# Altium PCB TINY RTC I2C MODULE.pcbdoc
Units mil, origin at the board's own origin, x right, y up, seen from the top; angles counter-clockwise.
Board outline 2205 x 2070 mil, 2 copper layers (Top Layer, Bottom Layer); 1 components, 0 nets, 14 pads, 0 vias.
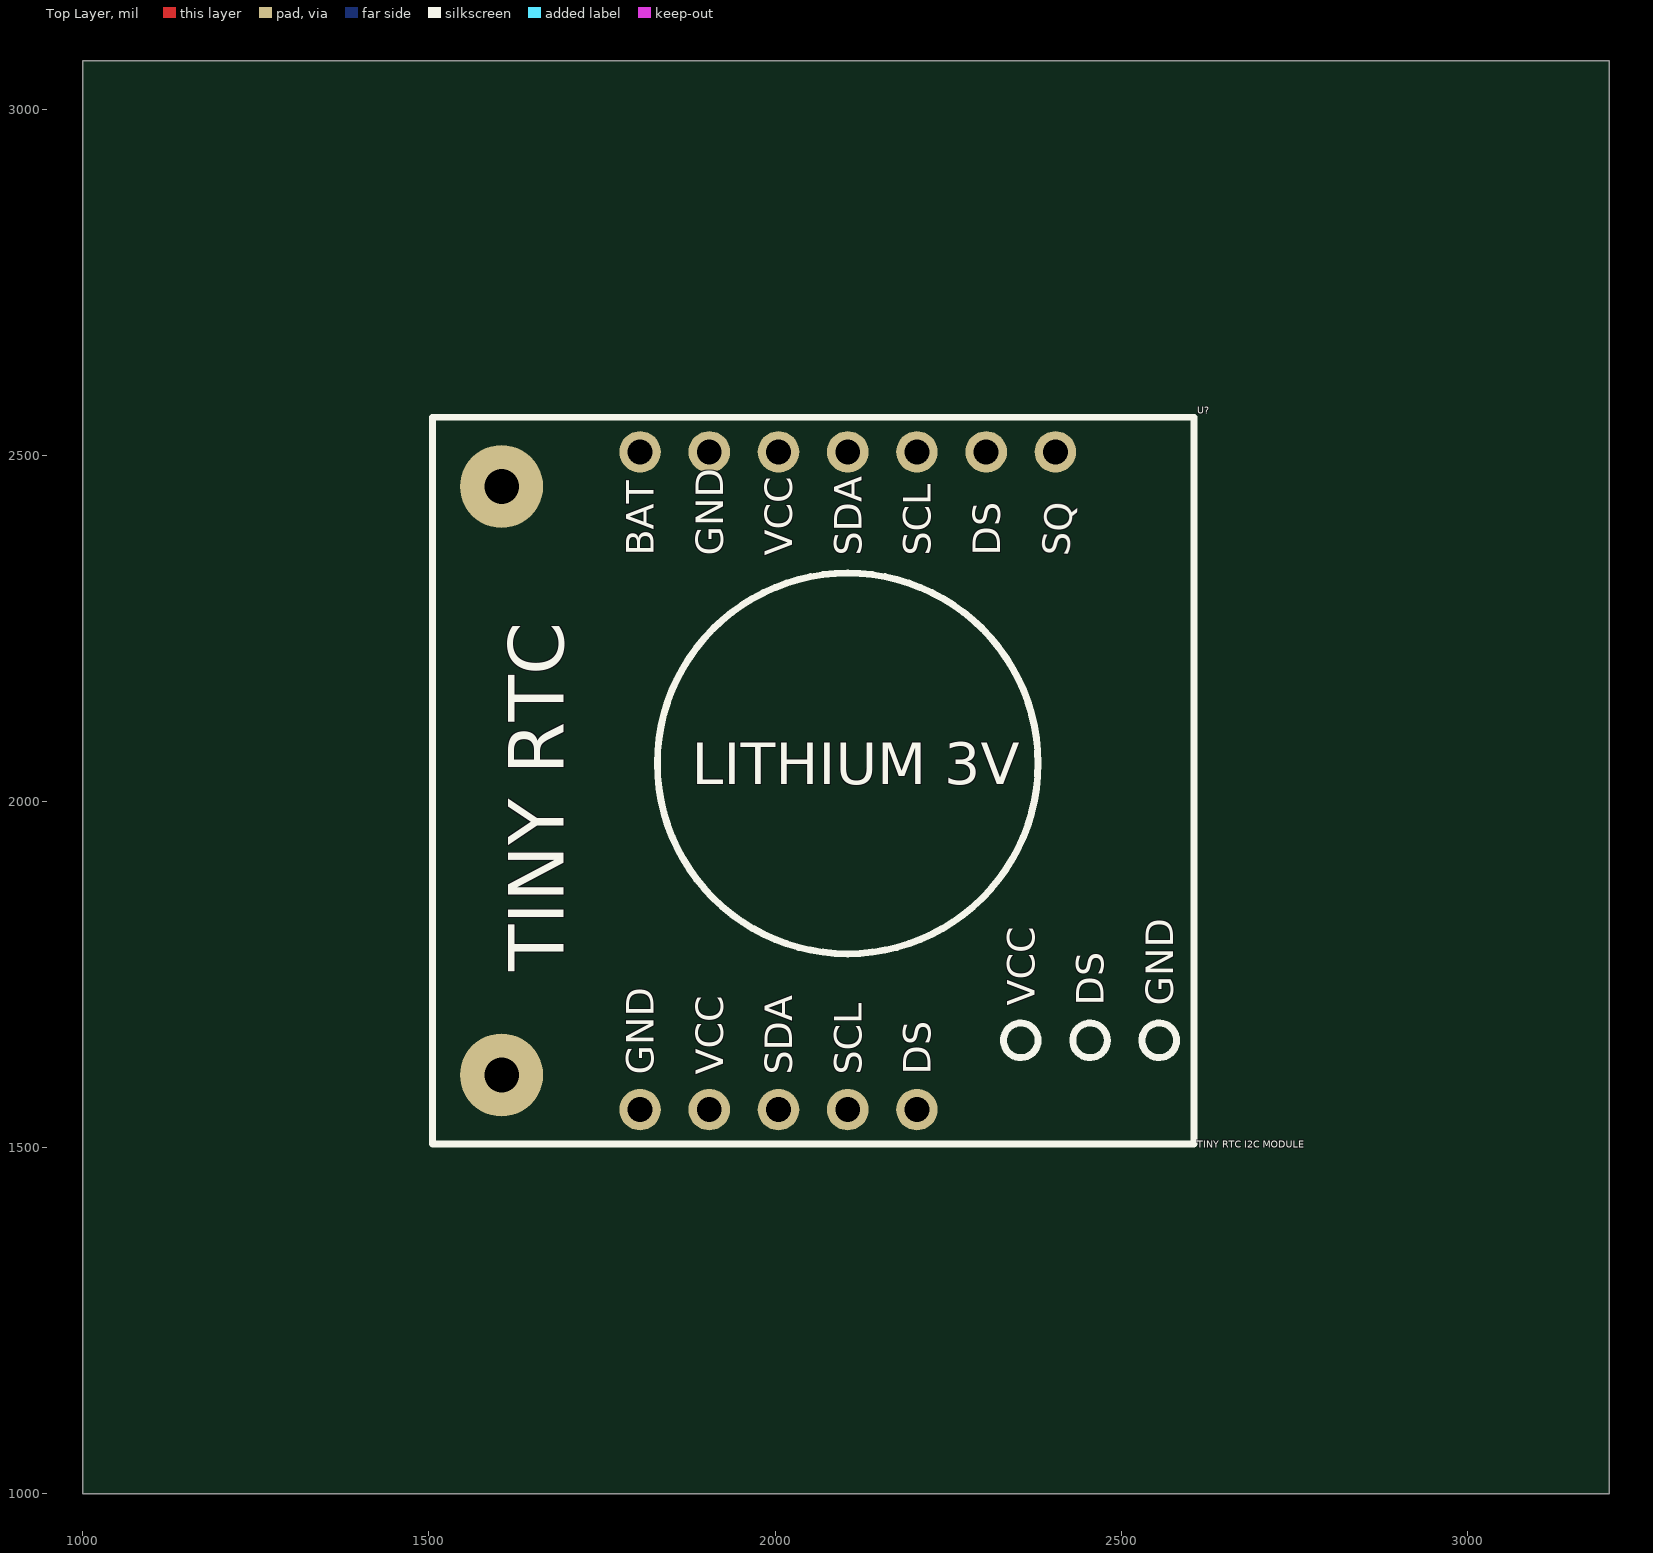
[diagram p0: Top Layer view]
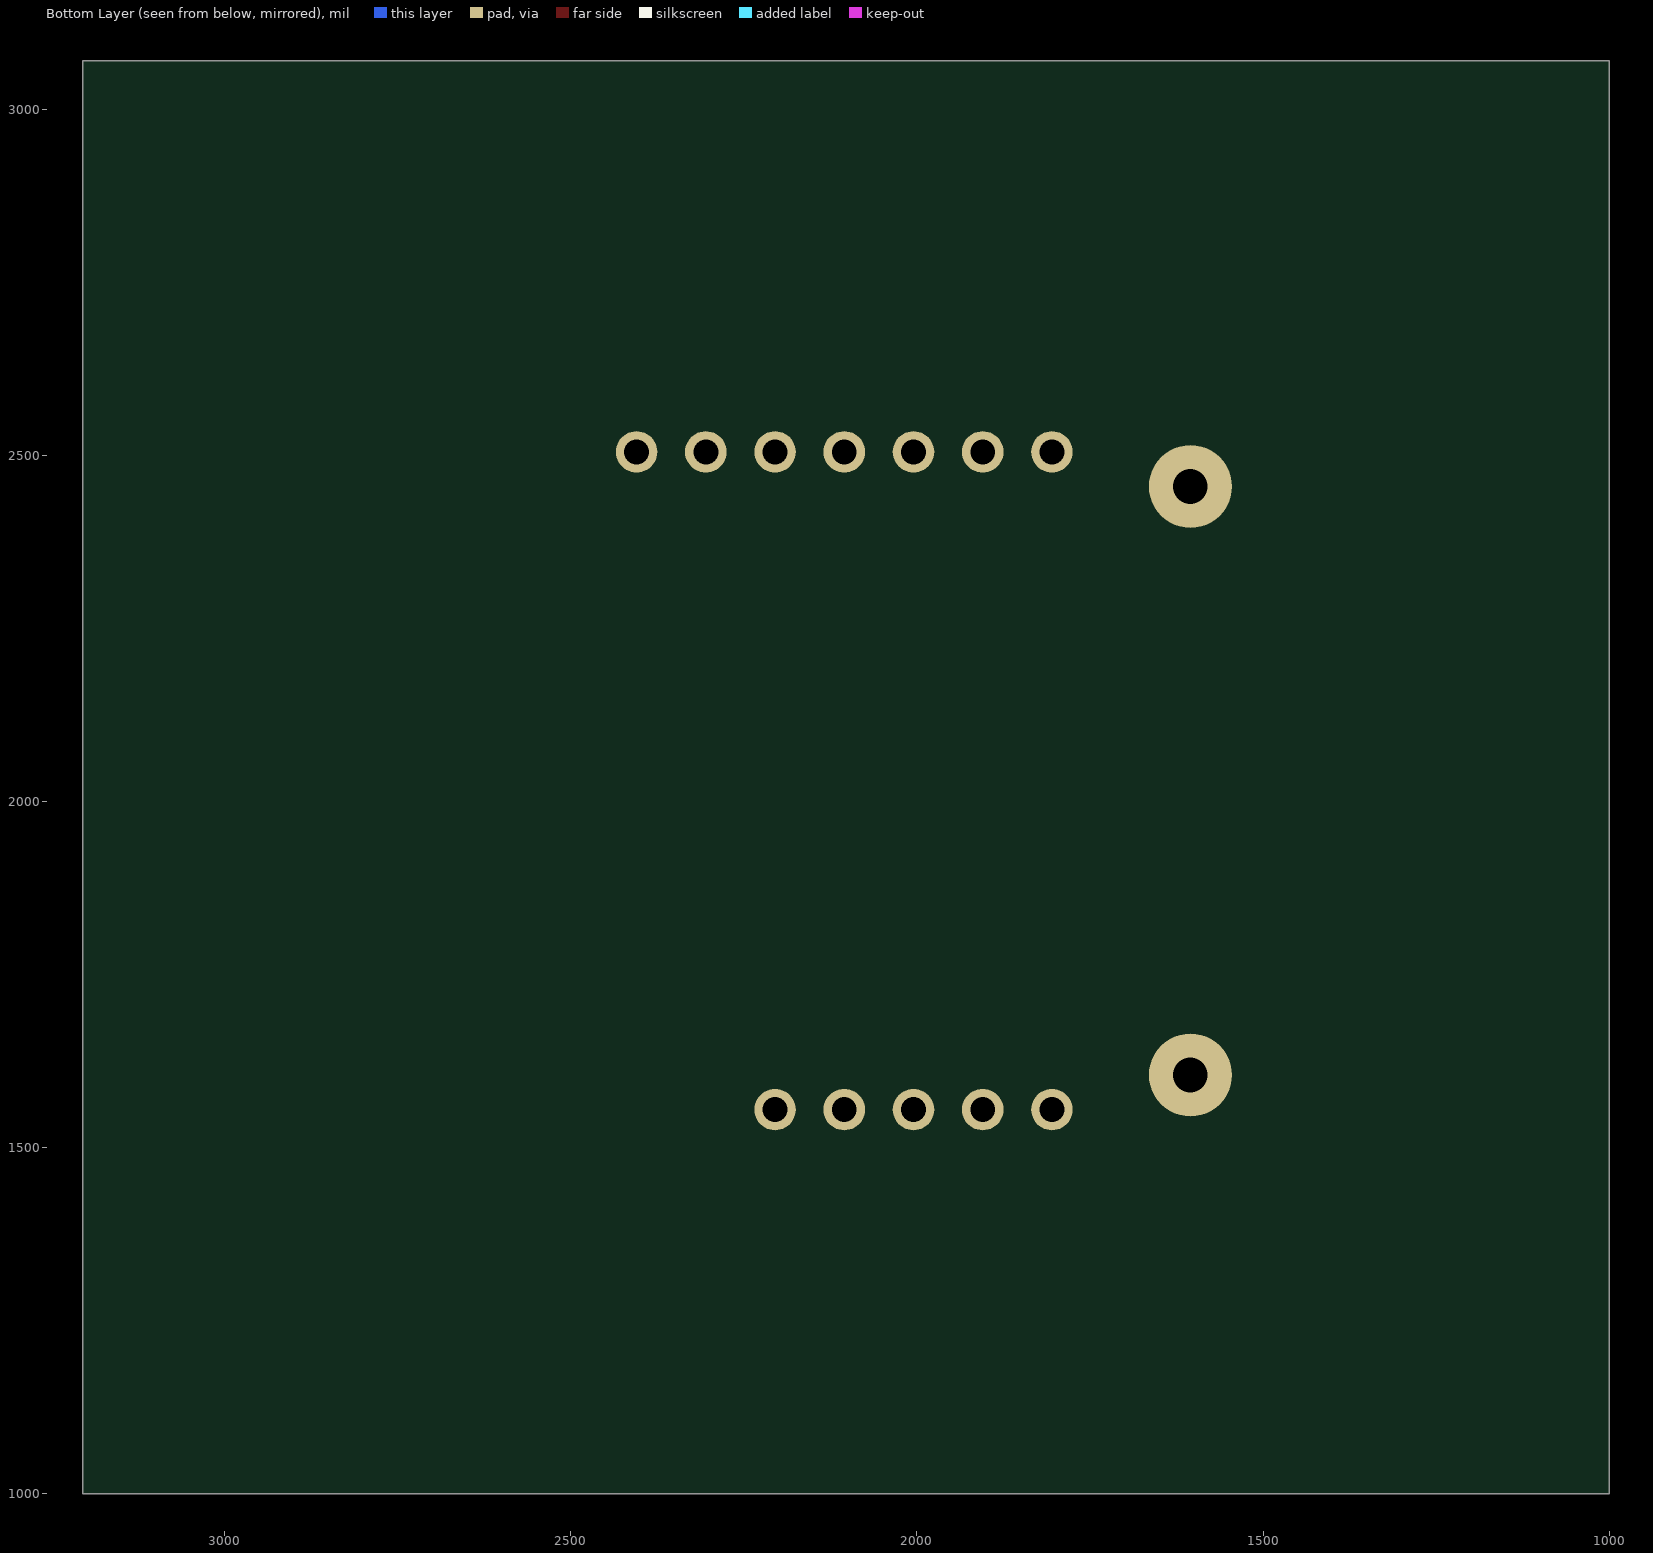
[diagram p1: Bottom Layer view, seen from below]

## Layer stack, top to bottom
Top Layer: signal copper (thickness not stored)
Dielectric: dielectric 12.6, FR-4, Dk 4.8
Bottom Layer: signal copper (thickness not stored)

## Board outline
3205,1000 1000,1000 1000,3070 3205,3070

## Components (designator, comment, footprint, x,y, rotation, side; value= is the part's Value field where it differs from the comment)
U? "TINY RTC I2C MODULE" "TINY RTC I2C MODULE" 2055,2030 r0 top

## Footprints (in the part's own frame and the unit in brackets; to place one, negate y for a bottom-side part, rotate by r counter-clockwise, add the part's x,y. Pads: shape width x height; smd on the part's side, far side on the other; paste and mask are expansions set on the pad)
"TINY RTC I2C MODULE" [mil]
  round 60 hole 36: 1(-250,475) 2(-150,475) 3(-50,475) 4(50,475) 5(150,475) 6(250,475) 7(350,475) 8(-250,-475) 9(-150,-475) 10(-50,-475) 11(50,-475) 12(150,-475)
  round 120 hole 50: 7(-450,425) 8(-450,-425)
  silkscreen extent -550,-525 550,525

## Nets (pads, with @x,y where several pads share a name; then routed paths per layer and width w, separated by ;. In a path a pad name is that pad's centre, name@x,y a point inside that pad or via, vN(x,y) a via of type N, cw(c..) or ccw(c..) an arc to the next point about the centre after c; other vN are vias at no path point)
pads on no net: U?.1 U?.2 U?.3 U?.4 U?.5 U?.6 U?.7 U?.8 U?.9 U?.10 U?.11 U?.12

## Silkscreen, mask and mechanical layers (free items; w line width, h text height)
Document:
  lines w0.1: 2101.5,2034 2103.5,2036

## Text inside footprints (layer, text, board x,y; h text height)
U?: Top Overlay "TINY RTC" at 1695,1755 h80 r90; Top Overlay "BAT" at 1825,2355 h40 r90; Top Overlay "GND" at 1925,2355 h40 r90; Top Overlay "VCC" at 2025,2355 h40 r90; Top Overlay "SDA" at 2125,2355 h40 r90; Top Overlay "SCL" at 2225,2355 h40 r90; Top Overlay "DS" at 2325,2355 h40 r90; Top Overlay "SQ" at 2424.95,2353.6 h40 r86; Top Overlay "DS" at 2475,1705 h40 r90; Top Overlay "GND" at 2575,1705 h40 r90; Top Overlay "VCC" at 2375,1705 h40 r90; Top Overlay "DS" at 2225,1605 h40 r90; Top Overlay "GND" at 1825,1605 h40 r90; Top Overlay "VCC" at 1925,1605 h40 r90; Top Overlay "SDA" at 2025,1605 h40 r90; Top Overlay "SCL" at 2125,1605 h40 r90; Top Overlay "LITHIUM 3V" at 1880,2025 h60